# Altium PCB L6203直流电机驱动器.PCBDOC
Units mil, origin at the board's own origin, x right, y up, seen from the top; angles counter-clockwise.
Board outline 6000 x 4000 mil, 2 copper layers (Top Layer, Bottom Layer); 24 components, 28 nets, 73 pads, 0 vias.
Unrouted connection lines stored in the file: 45.
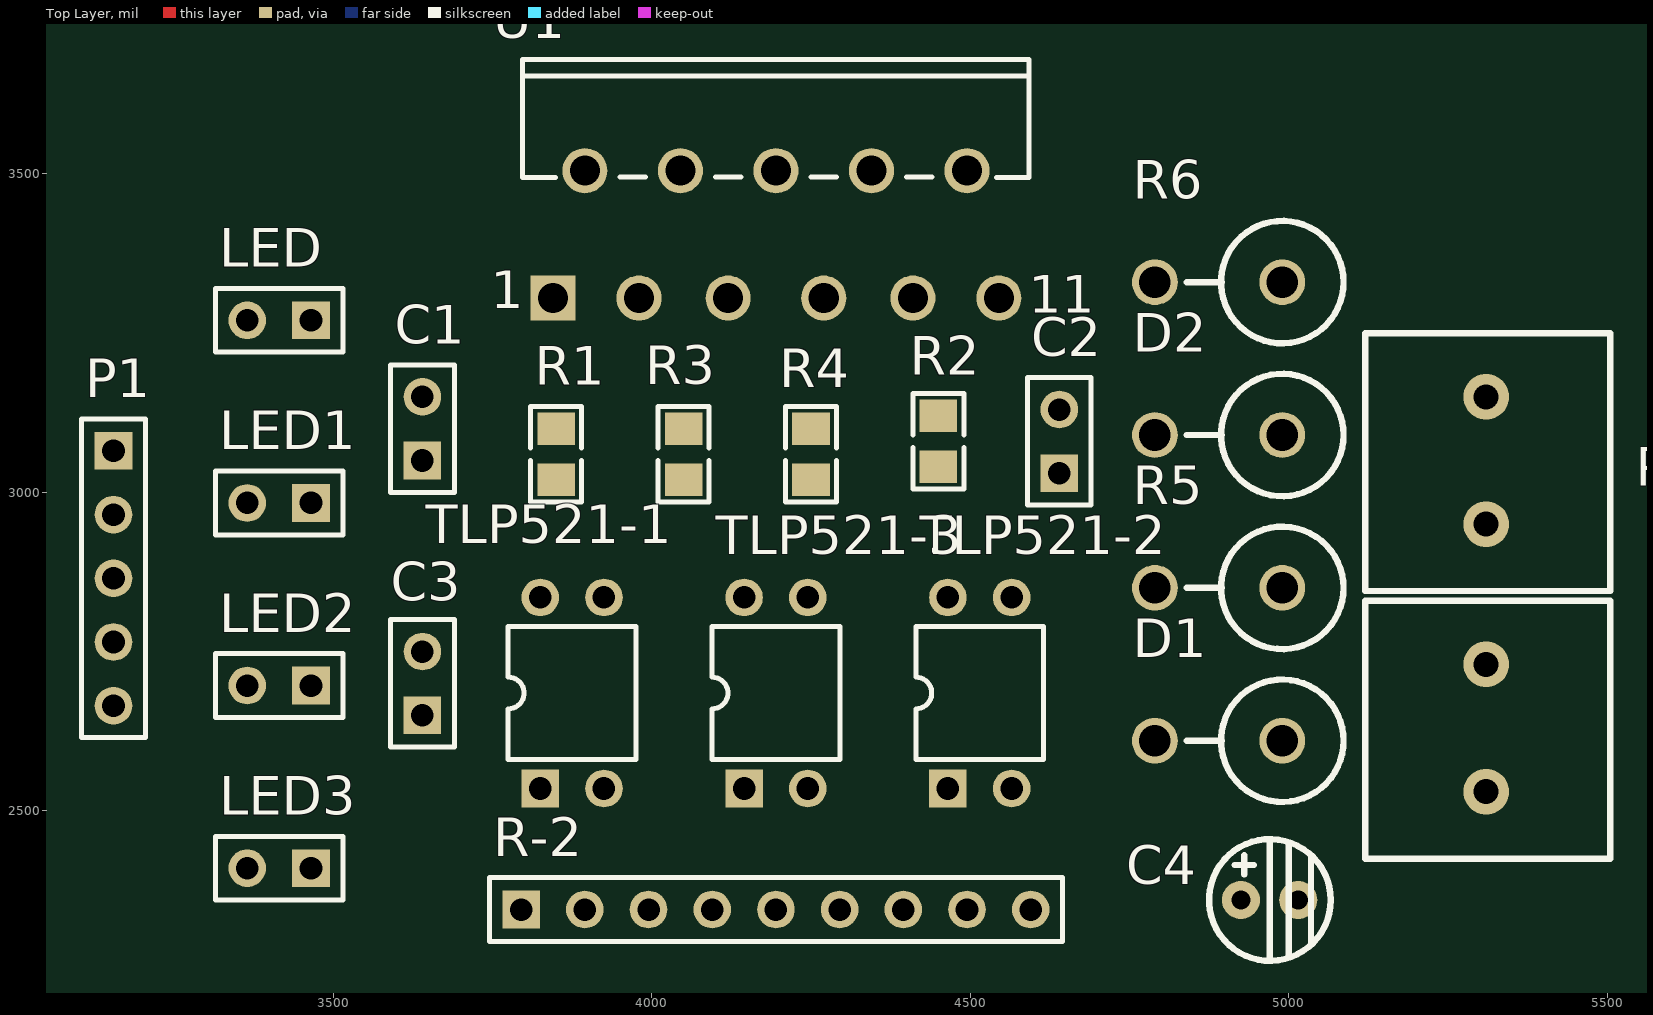
[diagram p0: Top Layer view]
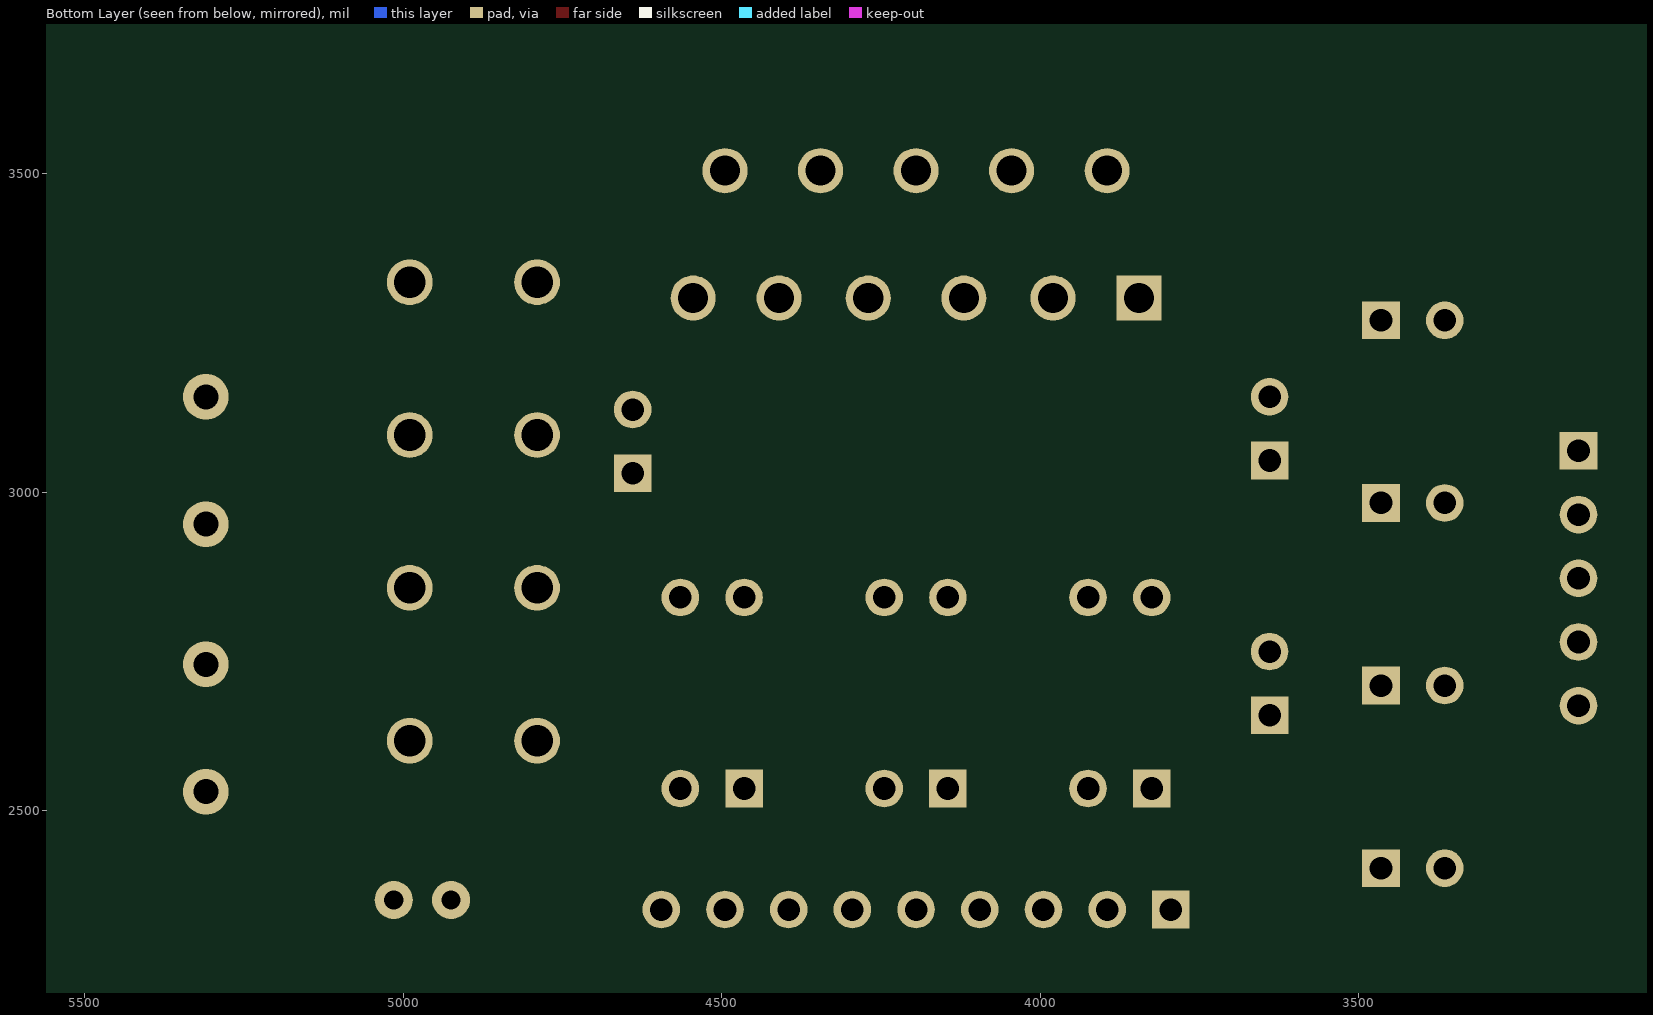
[diagram p1: Bottom Layer view, seen from below]

## Layer stack, top to bottom
Top Layer: signal copper 1.4
Dielectric: dielectric 12.6, FR-4, Dk 4.8
Bottom Layer: signal copper 1.4

## Board outline
1000,1000 7000,1000 7000,5000 1000,5000

## Design rules (kind name [scope] priority, off if disabled: settings)
Clearance [All] p1: gap=10
ComponentClearance [All] p1: gap=10 collisioncheckmode=3 verticalgap=10
PolygonConnect [All] p1: connectstyle=Relief reliefconductorwidth=10 reliefentries=4 polygonreliefangle="90 Angle"
RoutingVias [All] p1: holewidth=28 width=50 viastyle="Through Hole" minholewidth=28 minwidth=50 maxholewidth=28 maxwidth=50
SolderMaskExpansion [All] p1: expansion=4
TestPointUsage [All] p1: valid=0 allowmultiple=FALSE
Testpoint [All] p1: side=15 testpointundercomponent=TRUE minsize=40 maxsize=100 preferedsize=60 minholesize=0 maxholesize=40 preferedholesize=32 testpointgrid=1 style=1023 order=0-112345678
Width [All] p1: maxlimit=10 minlimit=10 preferedwidth=10
17 further rules are at their usual default settings.

## Components (designator, comment, footprint, x,y, rotation, side; value= is the part's Value field where it differs from the comment)
C1 "" CPDR 3640,3100 r90 top
C2 "" CPDR 4640,3080 r90 top
C3 "" CPDR 3640,2700 r90 top
C4 "" C-DJ-4 5020,2260 r0 top
D1 "1N4007" ZCDZL 4890,2510 r270 top
D2 "1N4007" ZCDZL 4890,2990 r270 top
LED "LED" CPDR 3415,3270 r180 top
LED1 "" HDR1X2 3465,2983.33 r180 top
LED2 "" HDR1X2 3465,2696.67 r180 top
LED3 "" HDR1X2 3465,2410 r180 top
M1 "" JK128_2 5355,2710 r0 top
P1 "PZ_5" HDR-5 3200,2820 r270 top
POWER "" JK128_2 5355,3130 r0 top
R1 "Res" TP-0805-R 3900,3160 r90 top
R2 "Res" TP-0805-R 4400,2980 r270 top
R3 "Res" TP-0805-R 4000,2960 r270 top
R4 "Res" TP-0805-R 4200,2960 r270 top
R5 "Res" ZCDZL 4890,2750 r270 top
R6 "Res" ZCDZL 4890,3230 r270 top
R-2 "" HDR1X9 3795,2345 r0 top
TLP521-1 "" DIP-4 3875,2685 r0 top
TLP521-2 "" DIP-4 4515,2685 r0 top
TLP521-3 "" DIP-4 4195,2685 r0 top
U1 "L6203" LMD18200 4195,3505 r0 top

## Footprints (in the part's own frame and the unit in brackets; to place one, negate y for a bottom-side part, rotate by r counter-clockwise, add the part's x,y. Pads: shape width x height; smd on the part's side, far side on the other; paste and mask are expansions set on the pad)
C-DJ-4 [mil] "电容4mm"
  round 60 hole 30: 1(-95,100) 2(-5,100)
  silkscreen extent -145,5 46,195
CPDR [mm] "瓷片电容"
  rect 1.5x1.5 hole 0.9: 1(-1.27,0)
  round 1.5 hole 0.9: 2(1.27,0)
  silkscreen extent -2.54,-1.27 2.54,1.27
DIP-4 [mm] "DIP; 4 Leads; Row Spacing 7.62 mm; Pitch 2.54 mm"
  rect 1.5x1.5 hole 0.9: 1(-1.27,-3.81)
  round 1.5 hole 0.9: 2(1.27,-3.81) 3(1.27,3.81) 4(-1.27,3.81)
  silkscreen extent -2.55,-2.65 2.55,2.65
HDR1X2 [mm] "Connector; Header; 2 Position"
  rect 1.5x1.5 hole 0.9: 1(0,0)
  round 1.5 hole 0.9: 2(2.54,0)
  silkscreen extent -1.27,-1.27 3.81,1.27
HDR1X9 [mm] "Connector; Header; 9 Position"
  rect 1.5x1.5 hole 0.9: 1(0,0)
  round 1.5 hole 0.9: 2(2.54,0) 3(5.08,0) 4(7.62,0) 5(10.16,0) 6(12.7,0) 7(15.24,0) 8(17.78,0) 9(20.32,0)
  silkscreen extent -1.27,-1.27 21.59,1.27
HDR-5 [mm] "5排针"
  rect 1.5x1.5 hole 0.9: 1(-6.223,-1.143)
  round 1.5 hole 0.9: 2(-3.683,-1.143) 3(-1.143,-1.143) 4(1.397,-1.143) 5(3.937,-1.143)
  silkscreen extent -7.49,-2.41 5.21,0.13
JK128_2 [mil] "接线端子"
  round 71.81 hole 39.37: 1(-45,20) 2(-45,-180)
  silkscreen extent -235,-285 150,120
LMD18200 [mm] "直流电机驱动"
  rect 1.8x1.8 hole 1.2: 1(-8.89,-5.08)
  round 1.8 hole 1.2: 2(-7.62,0) 3(-5.461,-5.08) 4(-3.81,0) 5(-1.905,-5.08) 6(0,0) 7(1.905,-5.08) 8(3.81,0) 9(5.461,-5.08) 10(7.62,0) 11(8.89,-5.08)
  silkscreen extent -10.1,-0.27 10.1,4.43
TP-0805-R [mm] "贴片0805"
  rect 1.3x1.5 smd: 1(-3.556,1.27) 2(-1.524,1.27)
  silkscreen extent -4.44,0.25 -0.64,2.29
ZCDZL [mil] "直插电阻立式插"
  round 71.81 hole 49.69: 1(-100,100) 2(-100,-100)
  silkscreen extent -196,-50 -4,196

## Part data
C1 C2 C3: library part Cap, "Capacitor"
C4: library part "Cap Pol3", "Polarized Capacitor (Surface Mount)"
D1 D2: library part "Diode 1N4007", "1 Amp General Purpose Rectifier"
LED: "发光二极管"
LED1 LED2 LED3: library part LED3, "Typical BLUE SiC LED"
M1 POWER: library part MHDR1X2, "Header, 2-Pin"
P1: "排针——5"
R1 R2 R3 R4 R5 R6: "电阻"
R-2: library part "Header 9", "Header, 9-Pin"
TLP521-1 TLP521-2 TLP521-3: library part TLP521-1
U1: "DMOS Full Bridge Driver"

## Nets (pads, with @x,y where several pads share a name; then routed paths per layer and width w, separated by ;. In a path a pad name is that pad's centre, name@x,y a point inside that pad or via, vN(x,y) a via of type N, cw(c..) or ccw(c..) an arc to the next point about the centre after c; other vN are vias at no path point)
4: C1.2 U1.4
8: C2.2 U1.8
+5V: P1.1 R1.1 R-2.1
GND: C4.2 D1.1 D2.1 LED.2 P1.2 POWER.2 R2.2 R3.2 R4.2 R6.1 U1.6
NetC1_1: C1.1 D1.2 M1.1 R5.1 U1.3
NetC2_1: C2.1 C3.2 D2.2 M1.2 U1.1
NetC3_1: C3.1 R5.2
NetC4_1: C4.1 U1.9
NetLED1_1: LED1.1 TLP521-1.2
NetLED1_2: LED1.2 P1.3
NetLED2_1: LED2.1 TLP521-2.2
NetLED2_2: LED2.2 P1.4
NetLED3_1: LED3.1 TLP521-3.2
NetLED3_2: LED3.2 P1.5
NetLED_1: LED.1 R1.2
NetR2_1: R2.1 TLP521-1.3 U1.11
NetR3_1: R3.1 TLP521-2.3 U1.5
NetR4_1: R4.1 TLP521-3.3 U1.7
NetR6_2: R6.2 U1.10
TLP00: R-2.2
TLP01: R-2.3 TLP521-3.1
TLP02: R-2.4 TLP521-2.1
TLP03: R-2.5 TLP521-1.1
TLP04: R-2.6 TLP521-1.4
TLP05: R-2.7 TLP521-2.4
TLP06: R-2.8 TLP521-3.4
TLP07: R-2.9
VSS: POWER.1 U1.2

## Text inside footprints (layer, text, board x,y; h text height)
U1: Top Overlay "11" at 4591.98,3282.09 h59.06; Top Overlay "1" at 3747,3288.83 h59.06